# Altium PCB A.PcbDoc (part 3 of 3)
Units mm, origin at the board's own origin, x right, y up, seen from the top; angles counter-clockwise.
Board outline 93 x 60 mm, 2 copper layers (Top Layer, Bottom Layer); 76 components, 75 nets, 446 pads, 247 vias.
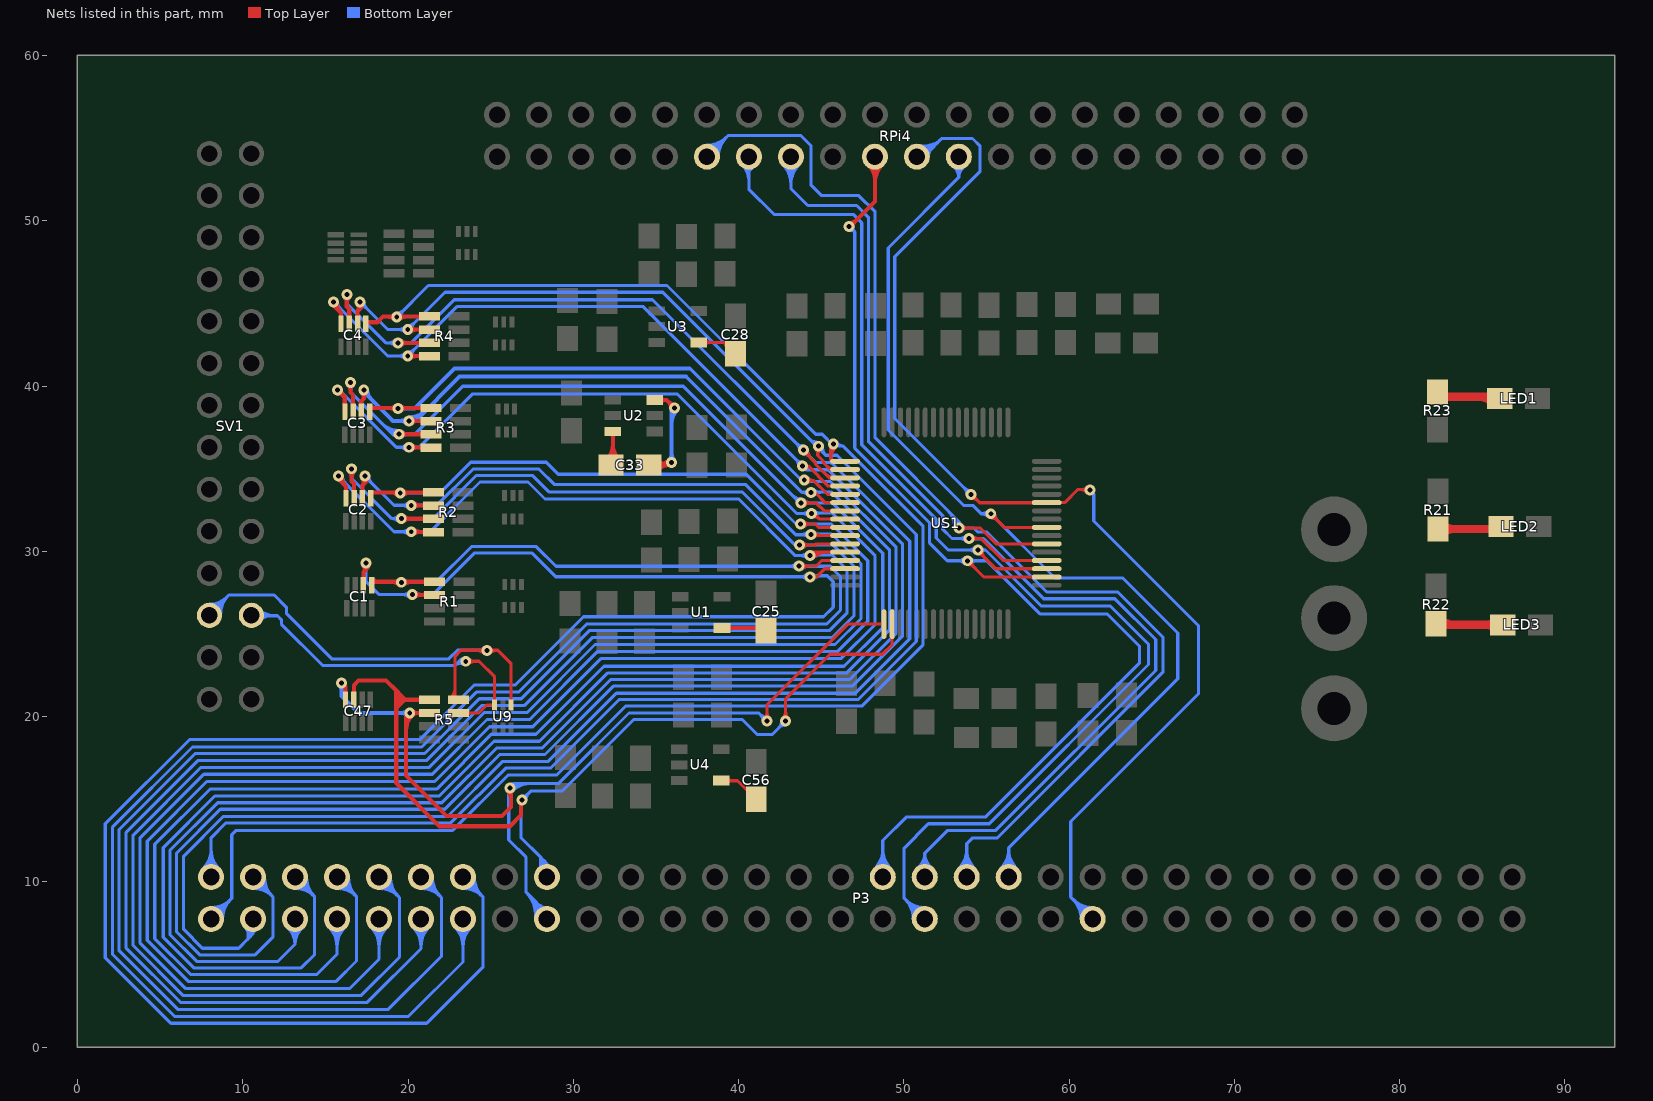
[diagram p3: the nets of this part, all layers, seen from the top]

## Via types
v1: diameter 0.66, hole 0.3, Top Layer to Bottom Layer, tented both sides, 247 vias

## Nets (pads, with @x,y where several pads share a name; then routed paths per layer and width w, separated by ;. In a path a pad name is that pad's centre, name@x,y a point inside that pad or via, vN(x,y) a via of type N, cw(c..) or ccw(c..) an arc to the next point about the centre after c; other vN are vias at no path point) (continued)
IN2N: C1.4 P3.13 R1.8 US1.13 | length 131.4
  Top Layer w0.19: v1(43.661,29.102) 44.687,29.102 45.031,29.446 US1.13@46.443,29.446 ; v1@43.827,28.936 cw(c44.228,28.535) 44.228,29.102 cw(c44.228,29.669) v1@43.827,29.268
  Top Layer w0.25: C1.4@17.832,28.321 ccw(c18.234,28.723) 18.234,28.155 ; C1.4@17.863,28.155 R1.8@21.597,28.155 ; 19.023,28.155 cw(c19.023,27.555) v1@19.447,27.979 ; 19.172,28.155 ccw(c19.172,28.544) v1@19.447,28.269 ; v1@19.737,27.979 cw(c20.162,27.555) 20.162,28.155 ; v1@19.737,28.269 ccw(c20.013,28.544) 20.013,28.155 ; R1.8@21.125,28.064 ccw(c20.905,27.843) 20.905,28.155 ccw(c20.905,28.466) R1.8@21.125,28.246
  Bottom Layer w0.19: v1(19.592,28.124) 21.681,28.124 23.842,30.285 27.763,30.285 28.957,29.092 45.545,29.092 46.171,28.465 46.171,26.44 45.323,25.592 30.801,25.592 26.685,21.476 24.137,21.476 20.823,18.162 6.964,18.162 2.129,13.327 2.129,5.602 5.88,1.852 20.026,1.852 23.325,5.151 P3.13@23.325,7.752 ; v1@19.758,27.958 cw(c20.16,27.557) 20.16,28.124 cw(c20.16,28.691) v1@19.758,28.29 ; P3.13@22.835,7.263 cw(c21.653,6.081) 23.325,6.081 cw(c24.996,6.081) P3.13@23.814,7.263 ; P3.13@22.97,7.397 cw(c22.112,6.54) 23.325,6.54 cw(c24.538,6.54) P3.13@23.68,7.397 ; 43.069,29.092 ccw(c43.069,29.694) v1@43.495,29.268 ; 43.118,29.092 cw(c43.118,28.56) v1@43.495,28.936 ; v1@43.827,28.936 cw(c44.203,28.56) 44.203,29.092 ; v1@43.827,29.268 ccw(c44.253,29.694) 44.253,29.092
IN2P: C1.3 P3.14 R1.7 US1.14 | length 139.7
  Top Layer w0.19: 17.447,28.88 17.454,28.887 ; v1(44.317,28.456) 44.729,28.456 ; v1@44.351,28.543 v1@44.381,28.512 ; v1@44.519,28.337 cw(c44.729,28.212) 44.729,28.456 ; v1@44.519,28.576 ccw(c44.729,28.701) 44.729,28.456 ; US1.14@46.443,28.946 45.219,28.946 44.815,28.543 44.729,28.456
  Top Layer w0.25: C1.3@17.304,27.958 17.304,28.737 ; v1@17.307,29.146 cw(c17.098,28.943) 17.304,28.737 ; v1@17.327,29.129 cw(c17.129,28.88) 17.447,28.88 ; v1@17.447,29.296 17.447,28.88 ; 17.483,28.916 ccw(c17.28,29.12) v1@17.486,29.32 ; v1@17.572,29.122 ccw(c17.743,28.88) 17.447,28.88 ; v1@20.346,27.365 R1.7@21.569,27.365 ; v1@20.403,27.23 cw(c20.729,26.905) 20.729,27.365 ; v1@20.403,27.52 ccw(c20.778,27.895) 20.778,27.365 ; 20.879,27.365 cw(c20.879,27.018) R1.7@21.125,27.264 ; 20.93,27.365 ccw(c20.93,27.641) R1.7@21.125,27.446 ; 17.304,28.737 17.447,28.88
  Bottom Layer w0.19: v1@17.288,29.123 cw(c16.887,28.722) 17.454,28.722 cw(c18.021,28.722) v1@17.62,29.123 ; v1(17.454,29.289) 17.454,28.186 18.264,27.375 v1(20.258,27.375) 21.491,27.375 24.006,29.891 27.506,29.891 28.941,28.456 v1(44.317,28.456) 44.378,28.518 45.37,28.518 45.726,28.162 45.726,26.624 45.139,26.037 30.617,26.037 26.501,21.92 24.021,21.92 20.707,18.606 6.78,18.606 1.685,13.511 1.685,5.41 5.649,1.446 21.128,1.446 24.547,4.864 24.547,9.071 P3.14@23.325,10.292 ; v1@20.092,27.209 ccw(c19.691,26.808) 19.691,27.375 ccw(c19.691,27.943) v1@20.092,27.542 ; v1@20.425,27.209 cw(c20.826,26.808) 20.826,27.375 cw(c20.826,27.943) v1@20.425,27.542 ; P3.14@23.325,9.6 cw(c23.325,7.928) 24.507,9.11 cw(c25.689,10.292) P3.14@24.017,10.292 ; P3.14@23.325,9.79 cw(c23.325,8.577) 24.182,9.435 cw(c25.04,10.292) P3.14@23.827,10.292 ; v1@44.15,28.29 ccw(c43.749,27.889) 43.749,28.456 ccw(c43.749,29.024) v1@44.15,28.623 ; v1@44.483,28.29 cw(c45.033,27.74) 45.033,28.518 ; v1@44.483,28.623 ccw(c44.735,28.875) 44.735,28.518
IN3N: C2.2 P3.11 R2.6 US1.11 | length 135
  Top Layer w0.19: v1(43.697,30.371) 44.614,30.372 44.688,30.446 US1.11@46.443,30.446 ; v1@43.864,30.204 cw(c44.268,29.8) 44.268,30.372 ; v1@43.864,30.537 ccw(c44.262,30.935) 44.262,30.372
  Top Layer w0.25: v1@16.448,34.847 cw(c16.11,34.508) 16.588,34.508 ; 16.588,34.326 16.588,34.241 ; 16.588,34.485 cw(c17.099,34.485) v1@16.738,34.847 ; v1(16.593,34.992) 16.588,34.987 16.588,34.241 ; C2.2@16.738,33.216 16.738,34.091 16.588,34.241 ; v1@19.412,31.973 19.62,31.973 R2.6@21.506,31.973 ; v1@19.739,31.829 cw(c20.086,31.481) 20.086,31.973 ; v1@19.739,32.118 ccw(c20.091,32.471) 20.091,31.973 ; 20.817,31.973 cw(c20.817,31.626) R2.6@21.062,31.871 ; 20.867,31.973 ccw(c20.867,32.248) R2.6@21.062,32.053
  Bottom Layer w0.19: v1@16.427,34.826 cw(c16.026,34.424) 16.593,34.424 cw(c17.16,34.424) v1@16.759,34.826 ; v1(16.593,34.992) 16.593,34.406 19.026,31.973 v1(19.594,31.973) 21.526,31.973 24.144,34.591 27.526,34.591 28.524,33.593 40.208,33.593 43.429,30.372 45.719,30.372 46.986,29.106 46.986,26.102 45.661,24.777 31.139,24.777 27.022,20.661 24.449,20.661 21.135,17.347 7.301,17.347 2.944,12.99 2.944,5.992 6.231,2.705 17.533,2.705 20.785,5.957 P3.11@20.785,7.752 ; v1@19.427,31.807 ccw(c19.026,31.406) 19.026,31.973 ccw(c19.026,32.541) v1@19.427,32.14 ; v1@19.76,31.807 cw(c20.161,31.406) 20.161,31.973 cw(c20.161,32.541) v1@19.76,32.14 ; P3.11@20.295,7.263 cw(c19.113,6.081) 20.785,6.081 cw(c22.456,6.081) P3.11@21.274,7.263 ; P3.11@20.43,7.397 cw(c19.572,6.54) 20.785,6.54 cw(c21.998,6.54) P3.11@21.14,7.397 ; v1@43.864,30.204 cw(c44.268,29.8) 44.268,30.372 ; v1@43.864,30.537 ccw(c44.261,30.934) 44.261,30.372
IN3P: C2.1 P3.12 R2.5 US1.12 | length 140.2
  Top Layer w0.19: v1(44.31,29.741) 44.515,29.946 US1.12@46.443,29.946 ; v1@44.341,29.709 cw(c44.914,29.136) 44.914,29.946 ; v1@44.476,29.575 cw(c45.373,28.677) 45.373,29.946
  Top Layer w0.25: v1@15.781,34.554 v1(15.788,34.547) 15.788,34.368 16.238,33.918 ; v1@15.993,34.54 ccw(c16.831,34.511) 16.238,33.918 ; C2.1@16.238,33.216 16.238,33.918 ; v1@20.284,31.173 R2.5@21.506,31.173 ; v1@20.341,31.038 cw(c20.666,30.712) 20.666,31.173 ; v1@20.341,31.328 ccw(c20.715,31.702) 20.715,31.173 ; 20.817,31.173 cw(c20.817,30.826) R2.5@21.062,31.071 ; 20.867,31.173 ccw(c20.867,31.448) R2.5@21.062,31.253
  Bottom Layer w0.19: v1@15.788,34.312 cw(c15.788,33.744) 16.189,34.146 cw(c16.59,34.547) v1@16.023,34.547 ; v1(15.788,34.547) 19.152,31.183 v1(20.196,31.183) 21.343,31.183 24.354,34.194 27.26,34.194 28.289,33.165 40.008,33.165 43.432,29.741 v1(44.31,29.741) 44.347,29.778 45.657,29.778 46.565,28.87 46.565,26.277 45.487,25.198 30.964,25.198 26.848,21.082 24.317,21.082 21.003,17.768 7.127,17.768 2.523,13.164 2.523,5.83 6.07,2.284 18.811,2.284 22.024,5.497 22.024,9.053 P3.12@20.785,10.292 ; v1@20.029,31.016 ccw(c19.628,30.615) 19.628,31.183 ccw(c19.628,31.75) v1@20.029,31.349 ; v1@20.362,31.016 cw(c20.763,30.615) 20.763,31.183 cw(c20.763,31.75) v1@20.362,31.349 ; P3.12@20.785,9.6 cw(c20.785,7.928) 21.967,9.11 cw(c23.149,10.292) P3.12@21.477,10.292 ; P3.12@20.785,9.79 cw(c20.785,8.577) 21.642,9.435 cw(c22.5,10.292) P3.12@21.287,10.292 ; v1@44.143,29.575 ccw(c43.742,29.173) 43.742,29.741 ccw(c43.742,30.308) v1@44.143,29.907 ; v1@44.476,29.575 cw(c44.966,29.084) 44.966,29.778 ; v1@44.476,29.907 ccw(c44.788,30.219) 44.788,29.778
IN4N: C2.4 P3.9 R2.8 US1.9 | length 125.5
  Top Layer w0.19: v1(43.754,31.641) 43.764,31.651 44.633,31.651 44.838,31.446 US1.9@46.443,31.446 ; v1@43.92,31.475 cw(c44.346,31.048) 44.346,31.651 ; v1@43.92,31.807 ccw(c44.295,32.183) 44.295,31.651
  Top Layer w0.25: C2.4@17.822,33.562 R2.8@21.534,33.562 ; 18.96,33.562 cw(c18.96,32.962) v1@19.385,33.386 ; 19.109,33.562 ccw(c19.109,33.952) v1@19.385,33.676 ; v1@19.674,33.386 cw(c20.099,32.962) 20.099,33.562 ; v1@19.674,33.676 ccw(c19.95,33.952) 19.95,33.562 ; R2.8@21.062,33.471 ccw(c20.842,33.251) 20.842,33.562 ccw(c20.842,33.874) R2.8@21.062,33.653
  Bottom Layer w0.19: P3.9@17.755,7.263 cw(c16.573,6.081) 18.245,6.081 cw(c19.916,6.081) P3.9@18.734,7.263 ; P3.9@17.89,7.397 cw(c17.032,6.54) 18.245,6.54 cw(c19.458,6.54) P3.9@18.6,7.397 ; P3.9@18.245,7.752 18.245,5.323 16.461,3.54 6.563,3.54 3.779,6.324 3.779,12.644 7.647,16.512 21.463,16.512 24.777,19.826 27.368,19.826 31.484,23.943 46.006,23.943 47.82,25.757 47.82,29.438 45.606,31.652 43.475,31.652 40.465,34.663 29.082,34.663 28.361,35.385 23.798,35.385 21.945,33.531 v1(19.529,33.531) ; v1@19.696,33.365 cw(c20.097,32.964) 20.097,33.531 cw(c20.097,34.099) v1@19.696,33.697 ; v1@43.92,31.475 cw(c44.349,31.046) 44.349,31.652 ; v1@43.92,31.807 ccw(c44.293,32.18) 44.293,31.652
IN4P: C2.3 P3.10 R2.7 US1.10 | length 134.6
  Top Layer w0.19: v1(44.37,31.021) 44.445,30.946 US1.10@46.443,30.946 ; v1@44.53,31.072 v1@44.558,31.045 ; v1@44.536,30.855 cw(c44.757,30.635) 44.757,30.946 ; v1@44.536,31.187 ccw(c45.119,31.77) 45.119,30.946
  Top Layer w0.25: C2.3@17.238,33.216 17.238,33.985 ; v1@17.241,34.404 cw(c17.027,34.196) 17.238,33.985 ; v1@17.265,34.383 cw(c17.078,34.135) 17.388,34.135 ; v1@17.381,34.554 v1(17.388,34.547) 17.388,34.135 ; 17.417,34.165 ccw(c17.209,34.373) v1@17.42,34.578 ; v1@17.511,34.383 ccw(c17.698,34.135) 17.388,34.135 ; v1@20.284,32.772 R2.7@21.506,32.772 ; v1@20.341,32.638 cw(c20.666,32.312) 20.666,32.772 ; v1@20.341,32.928 ccw(c20.715,33.302) 20.715,32.772 ; 20.817,32.772 cw(c20.817,32.426) R2.7@21.062,32.671 ; 20.867,32.772 ccw(c20.867,33.048) R2.7@21.062,32.853 ; 17.238,33.985 17.388,34.135
  Bottom Layer w0.19: v1@17.388,34.312 cw(c17.388,33.744) 17.789,34.146 cw(c18.19,34.547) v1@17.623,34.547 ; v1(17.388,34.547) 19.152,32.783 v1(20.196,32.783) 21.748,32.783 23.948,34.983 27.914,34.983 28.847,34.049 40.4,34.049 43.451,30.999 44.348,30.999 v1(44.37,31.021) 44.398,31.049 45.619,31.049 47.407,29.262 47.407,25.928 45.835,24.356 31.313,24.356 27.197,20.24 24.595,20.24 21.281,16.926 7.476,16.926 3.365,12.815 3.365,6.15 6.382,3.134 17.177,3.134 19.489,5.446 19.489,9.048 P3.10@18.245,10.292 ; P3.10@18.245,9.6 cw(c18.245,7.928) 19.427,9.11 cw(c20.609,10.292) P3.10@18.937,10.292 ; P3.10@18.245,9.79 cw(c18.245,8.577) 19.102,9.435 cw(c19.96,10.292) P3.10@18.747,10.292 ; v1@20.029,32.616 ccw(c19.628,32.215) 19.628,32.783 ccw(c19.628,33.35) v1@20.029,32.949 ; v1@20.362,32.616 cw(c20.763,32.215) 20.763,32.783 cw(c20.763,33.35) v1@20.362,32.949 ; 43.749,30.999 ccw(c43.749,31.643) v1@44.204,31.187 ; 43.857,30.999 cw(c43.857,30.508) v1@44.204,30.855 ; v1@44.536,30.855 cw(c45.006,30.386) 45.006,31.049 ; v1@44.536,31.187 ccw(c44.869,31.52) 44.869,31.049
IN5N: C3.2 P3.7 R3.6 US1.7 | length 134.2
  Top Layer w0.19: v1(43.781,32.932) 43.8,32.913 44.71,32.913 45.177,32.446 US1.7@46.443,32.446 ; v1@43.948,32.766 cw(c44.303,32.411) 44.303,32.913 ; v1@43.948,33.098 ccw(c44.395,33.545) 44.395,32.913
  Top Layer w0.25: v1@16.384,40.07 cw(c16.046,39.731) 16.524,39.731 ; 16.524,39.708 cw(c17.036,39.708) v1@16.674,40.07 ; v1(16.529,40.214) 16.524,40.21 16.524,39.614 16.674,39.464 C3.2@16.674,38.438 ; v1@19.273,37.083 v1@19.481,37.083 ; v1@19.481,37.082 R3.6@21.367,37.082 ; v1@19.599,36.938 cw(c19.947,36.59) 19.947,37.082 ; v1@19.599,37.228 ccw(c19.952,37.58) 19.952,37.082 ; 20.677,37.082 cw(c20.677,36.735) R3.6@20.923,36.98 ; 20.728,37.082 ccw(c20.728,37.358) R3.6@20.923,37.163
  Bottom Layer w0.19: P3.7@15.215,7.263 cw(c14.033,6.081) 15.705,6.081 cw(c17.376,6.081) P3.7@16.194,7.263 ; P3.7@15.35,7.397 cw(c14.492,6.54) 15.705,6.54 cw(c16.918,6.54) P3.7@16.06,7.397 ; P3.7@15.705,7.752 15.705,5.619 14.482,4.397 6.849,4.397 4.679,6.567 4.679,12.271 8.02,15.612 21.729,15.612 25.044,18.927 27.74,18.927 31.857,23.043 46.379,23.043 48.72,25.384 48.72,29.887 45.695,32.912 43.728,32.912 36.655,39.984 23.301,39.984 20.4,37.083 v1(19.454,37.083) 19.066,37.083 ; v1@16.363,40.048 cw(c15.962,39.647) 16.529,39.647 cw(c17.096,39.647) v1@16.695,40.048 ; v1(16.529,40.214) 16.529,39.62 19.066,37.083 ; 18.391,37.758 ccw(c19.454,38.822) v1@19.454,37.318 ; 18.715,37.434 ccw(c19.454,38.173) v1@19.454,37.128 ; 19.04,37.11 ccw(c19.454,37.524) v1@19.454,36.938 ; v1@19.246,36.974 ccw(c19.066,36.88) 19.066,37.083 ; v1@19.246,37.192 cw(c19.066,37.286) 19.066,37.083 ; v1@19.621,36.917 cw(c20.022,36.516) 20.022,37.083 cw(c20.022,37.65) v1@19.621,37.249 ; 43.254,33.386 ccw(c43.781,33.913) v1@43.781,33.167 ; 43.433,33.207 cw(c43.158,32.932) v1@43.546,32.932 ; v1@43.948,32.766 cw(c44.299,32.414) 44.299,32.912 ; v1@43.948,33.098 ccw(c44.398,33.549) 44.398,32.912
IN5P: C3.1 P3.8 R3.5 US1.8 | length 135.1
  Top Layer w0.19: v1@44.467,32.058 cw(c44.59,31.635) 44.902,31.946 ; v1@44.574,32.315 44.574,32.274 44.902,31.946 ; US1.8@46.443,31.946 44.902,31.946
  Top Layer w0.25: v1@15.717,39.777 v1(15.724,39.77) 16.174,39.32 C3.1@16.174,38.438 ; v1@15.724,39.565 cw(c15.724,39.07) 16.074,39.42 cw(c16.424,39.77) v1@15.929,39.77 ; v1@20.144,36.282 R3.5@21.367,36.282 ; v1@20.201,36.147 cw(c20.527,35.822) 20.527,36.282 ; v1@20.201,36.437 ccw(c20.576,36.811) 20.576,36.282 ; 20.677,36.282 cw(c20.677,35.935) R3.5@20.923,36.18 ; 20.728,36.282 ccw(c20.728,36.558) R3.5@20.923,36.363
  Bottom Layer w0.19: P3.8@15.705,9.6 cw(c15.705,7.928) 16.887,9.11 ; P3.8@15.705,9.79 cw(c15.705,8.577) 16.562,9.435 cw(c17.42,10.292) P3.8@16.207,10.292 ; P3.8@15.705,10.292 16.887,9.11 ; v1@15.724,39.535 cw(c15.724,38.734) 16.29,39.3 ; v1(15.724,39.77) 15.821,39.77 19.298,36.292 v1(20.056,36.292) 20.687,36.292 23.921,39.526 36.278,39.526 43.521,32.284 v1(44.402,32.284) 44.433,32.315 45.667,32.315 48.26,29.721 48.26,25.574 46.189,23.503 31.667,23.503 27.55,19.386 24.927,19.386 21.613,16.072 7.829,16.072 4.219,12.462 4.219,6.457 6.7,3.976 15.652,3.976 16.887,5.211 16.887,9.11 ; v1@15.959,39.77 ccw(c16.294,39.77) 16.057,39.533 ; P3.8@16.397,10.292 ccw(c18.069,10.292) 16.887,9.11 ; v1@19.89,36.126 ccw(c19.489,35.725) 19.489,36.292 ccw(c19.489,36.859) v1@19.89,36.458 ; v1@20.223,36.126 cw(c20.624,35.725) 20.624,36.292 cw(c20.624,36.859) v1@20.223,36.458 ; v1@44.236,32.117 ccw(c43.835,31.716) 43.835,32.284 ccw(c43.835,32.851) v1@44.236,32.45 ; v1@44.568,32.117 cw(c45.045,31.641) 45.045,32.315 ; v1@44.568,32.45 ccw(c44.894,32.776) 44.894,32.315
IN6N: C3.4 P3.5 R3.8 US1.5 | length 121.1
  Top Layer w0.19: v1@43.981,34.274 44.549,34.274 ; v1@44.141,34.142 cw(c44.459,33.823) 44.459,34.274 ; v1@44.155,34.458 ccw(c44.549,34.786) 44.549,34.274 ; US1.5@46.443,33.446 45.377,33.446 44.549,34.274
  Top Layer w0.25: C3.4@17.702,38.802 ccw(c18.017,39.116) 18.017,38.672 ; C3.4@17.727,38.672 R3.8@21.395,38.672 ; 18.821,38.672 cw(c18.821,38.071) v1@19.245,38.496 ; 18.97,38.672 ccw(c18.97,39.061) v1@19.245,38.786 ; v1@19.535,38.496 cw(c19.96,38.071) 19.96,38.672 ; v1@19.535,38.786 ccw(c19.811,39.061) 19.811,38.672 ; R3.8@20.923,38.58 ccw(c20.703,38.36) 20.703,38.672 ccw(c20.703,38.983) R3.8@20.923,38.763
  Bottom Layer w0.19: P3.5@12.707,7.233 cw(c11.817,6.221) 13.165,6.221 cw(c14.513,6.221) P3.5@13.622,7.233 ; P3.5@12.833,7.375 cw(c12.187,6.641) 13.165,6.641 cw(c14.143,6.641) P3.5@13.497,7.375 ; P3.5@13.165,7.752 13.165,6.221 12.133,5.189 7.216,5.189 5.594,6.811 5.594,11.898 8.482,14.786 22.049,14.786 25.363,18.1 28.12,18.1 32.261,22.24 46.721,22.24 49.529,25.049 49.529,30.248 45.558,34.219 43.89,34.219 37.041,41.069 ; v1@44.006,34.34 ccw(c44.297,34.631) 44.297,34.219 ; v1@44.141,34.142 cw(c44.328,33.955) 44.328,34.219 ; v1@44.141,34.474 ccw(c44.756,35.089) 44.756,34.219
  Bottom Layer w0.25: v1(19.39,38.641) 20.391,38.641 22.819,41.069 37.041,41.069 ; v1@19.535,38.496 cw(c19.885,38.146) 19.885,38.641 cw(c19.885,39.136) v1@19.535,38.786
  other v1: 43.975,34.308
IN6P: C3.3 P3.6 R3.7 US1.6 | length 130.2
  Top Layer w0.19: v1@44.399,33.584 44.61,33.584 45.248,32.946 US1.6@46.443,32.946
  Top Layer w0.25: C3.3@17.174,38.438 17.174,39.102 17.324,39.252 v1(17.324,39.77) v1@17.317,39.777 ; v1@17.179,39.625 cw(c16.829,39.275) 17.324,39.275 cw(c17.819,39.275) v1@17.469,39.625 ; v1@20.144,37.882 R3.7@21.367,37.882 ; v1@20.201,37.747 cw(c20.527,37.422) 20.527,37.882 ; v1@20.201,38.037 ccw(c20.576,38.411) 20.576,37.882 ; 20.677,37.882 cw(c20.677,37.535) R3.7@20.923,37.78 ; 20.728,37.882 ccw(c20.728,38.158) R3.7@20.923,37.963
  Bottom Layer w0.19: P3.6@13.165,9.6 cw(c13.166,7.93) 14.346,9.111 cw(c15.527,10.292) P3.6@13.857,10.292 ; P3.6@13.165,9.79 cw(c13.165,8.578) 14.022,9.435 cw(c14.879,10.292) P3.6@13.667,10.292 ; P3.6@13.165,10.292 14.346,9.111 14.346,5.605 13.536,4.795 7.04,4.795 5.188,6.646 5.188,12.066 8.314,15.192 21.887,15.192 25.2,18.505 27.952,18.505 32.093,22.646 46.553,22.646 49.124,25.217 49.124,30.092 45.633,33.582 44.323,33.582 44.303,33.562 43.833,33.562 ; 36.827,40.569 43.833,33.562 ; 43.864,33.562 ccw(c43.864,34.075) v1@44.226,33.713 ; v1@44.217,33.39 ccw(c43.833,33.05) 43.833,33.562 ; v1@44.558,33.38 cw(c45.046,32.893) 45.046,33.582 ; v1@44.558,33.713 ccw(c44.873,34.027) 44.873,33.582
  Bottom Layer w0.25: v1(17.324,39.77) 17.324,39.647 19.079,37.892 v1(20.056,37.892) 20.447,37.892 ; v1@17.529,39.77 ccw(c18.32,39.77) 17.761,39.21 ; v1@19.911,37.747 ccw(c19.562,37.397) 19.562,37.892 ccw(c19.562,38.387) v1@19.911,38.037 ; v1@20.056,37.847 ccw(c20.056,38.681) 20.646,38.091 ; v1@20.056,38.097 ccw(c20.056,39.534) 21.073,38.518 ; v1@20.225,37.776 cw(c20.447,37.623) 20.447,37.892 ; v1@20.225,38.008 ccw(c20.447,38.161) 20.447,37.892 ; 36.827,40.569 23.124,40.569 20.447,37.892
  other v1: 44.392,33.546
IN7N: C4.2 P3.3 R4.6 US1.3 | length 131.2
  Top Layer w0.19: v1@43.92,35.905 cw(c43.92,35.46) 44.235,35.775 ; v1@43.999,36.171 43.999,36.01 44.65,35.36 44.65,35.281 45.484,34.446 US1.3@46.443,34.446 ; v1@44.155,36.14 ccw(c44.845,36.14) 44.357,35.652 ; 45.242,34.688 ccw(c45.693,35.138) US1.3@45.693,34.501
  Top Layer w0.25: v1@16.155,45.393 cw(c15.817,45.054) 16.295,45.054 ; 16.295,45.031 cw(c16.807,45.031) v1@16.445,45.393 ; 16.295,45.033 16.295,44.817 ; v1(16.3,45.538) 16.295,45.533 16.295,44.817 ; C4.2@16.445,43.762 16.445,44.667 16.295,44.817 ; v1@19.201,42.61 v1@19.409,42.61 ; v1@19.41,42.609 R4.6@21.295,42.609 ; v1@19.528,42.465 cw(c19.875,42.118) 19.875,42.609 ; v1@19.528,42.755 ccw(c19.88,43.108) 19.88,42.609 ; R4.6@20.823,42.518 ccw(c20.603,42.298) 20.603,42.609 ccw(c20.603,42.921) R4.6@20.823,42.701
  Bottom Layer w0.19: P3.3@10.135,7.263 cw(c9.699,6.827) 10.316,6.827 ; P3.3@10.204,7.203 cw(c9.803,6.68) 10.462,6.68 cw(c10.869,6.68) P3.3@10.779,7.077 ; 10.316,6.507 cw(c10.898,6.507) P3.3@10.773,7.076 ; 10.316,6.744 cw(c10.846,6.744) P3.3@10.733,7.262 ; 10.316,6.98 cw(c10.794,6.98) P3.3@10.692,7.447 ; P3.3@10.449,7.083 cw(c10.39,6.855) 10.625,6.855 ; 10.462,6.918 cw(c10.815,6.918) P3.3@10.737,7.263 ; P3.3@10.8,7.083 ccw(c10.86,6.855) 10.625,6.855 ; v1@16.135,45.371 cw(c15.742,44.974) 16.3,44.974 ; 16.3,44.952 16.3,44.974 ; v1(16.3,45.538) 16.3,44.974 ; v1@16.466,45.371 ccw(c16.859,44.974) 16.3,44.974 ; v1@19.216,42.444 ccw(c18.815,42.043) 18.815,42.61 ccw(c18.815,43.178) v1@19.216,42.777 ; v1@19.549,42.444 cw(c19.95,42.043) 19.95,42.61 cw(c19.95,43.178) v1@19.549,42.777 ; 43.438,36.575 ccw(c43.92,37.057) v1@43.92,36.375 ; 43.552,36.46 cw(c43.232,36.14) v1@43.685,36.14 ; v1@43.92,35.905 cw(c43.92,35.452) 44.24,35.772 ; v1@44.155,36.14 ccw(c44.837,36.14) 44.355,35.658 ; 45.571,35.358 cw(c45.571,35.255) 45.644,35.328 ; 10.316,6.546 10.462,6.692 ; 10.316,6.546 9.753,5.984 7.56,5.984 6.422,7.122 6.422,11.555 8.825,13.958 22.388,13.958 25.701,17.271 28.463,17.271 32.604,21.412 47.064,21.412 50.358,24.705 50.358,30.614 45.595,35.377 44.635,35.377 34.789,45.223 22.799,45.223 20.186,42.61 v1(19.383,42.61) 18.664,42.61 16.3,44.974 ; 10.316,6.546 10.316,7.443 cw(c10.625,7.443) P3.3@10.625,7.752 ; 10.462,6.692 10.462,7.59 cw(c10.625,7.59) P3.3@10.625,7.752 ; 10.462,6.692 10.625,6.855 ; 10.625,6.855 P3.3@10.625,7.752
  other v1: 43.92,36.14
IN7P: C4.1 P3.4 R4.5 US1.4 | length 129.9
  Top Layer w0.19: v1(43.872,35.166) 44.21,35.166 ; v1@44.093,35.084 cw(c44.21,35.041) 44.21,35.166 ; v1@44.093,35.247 ccw(c44.21,35.291) 44.21,35.166 ; US1.4@46.443,33.946 45.43,33.946 44.21,35.166
  Top Layer w0.25: v1@15.488,45.1 v1(15.495,45.093) 15.495,44.882 15.945,44.432 ; v1@15.7,45.08 ccw(c16.542,45.029) 15.945,44.432 ; C4.1@15.945,43.762 15.945,44.432 ; v1@20.073,41.809 R4.5@21.295,41.809 ; v1@20.13,41.675 cw(c20.455,41.349) 20.455,41.809 ; v1@20.13,41.965 ccw(c20.504,42.339) 20.504,41.809 ; R4.5@20.823,41.718 ccw(c20.603,41.498) 20.603,41.809 ccw(c20.603,42.121) R4.5@20.823,41.901
  Bottom Layer w0.19: P3.4@10.625,9.6 cw(c10.625,7.928) 11.807,9.11 cw(c12.989,10.292) P3.4@11.317,10.292 ; P3.4@10.625,9.79 cw(c10.625,8.577) 11.482,9.435 cw(c12.34,10.292) P3.4@11.127,10.292 ; P3.4@10.625,10.292 11.824,9.094 11.824,6.656 10.75,5.582 7.394,5.582 5.992,6.984 5.992,11.733 8.647,14.388 22.233,14.388 25.547,17.702 28.285,17.702 32.426,21.843 46.886,21.843 49.927,24.884 49.927,30.435 45.429,34.934 44.095,34.934 34.21,44.819 22.984,44.819 v1(19.985,41.82) 18.769,41.82 v1(15.495,45.093) ; v1@15.495,44.858 cw(c15.495,44.29) 15.897,44.692 cw(c16.298,45.093) v1@15.73,45.093 ; v1@19.819,41.653 ccw(c19.417,41.252) 19.417,41.82 ccw(c19.417,42.387) v1@19.819,41.986 ; v1@19.985,42.055 ccw(c19.985,42.622) 20.386,42.221 ccw(c20.787,41.82) v1@20.22,41.82 ; 43.455,35.573 ccw(c43.872,35.991) v1@43.872,35.401 ; 43.478,35.551 cw(c43.092,35.166) v1@43.637,35.166
IN8N: C4.4 P3.1 R4.8 US1.1 | length 114.3
  Top Layer w0.19: 45.561,35.528 cw(c46.704,35.528) v1@45.896,36.337 ; 45.561,35.898 ccw(c46.144,35.898) US1.1@45.732,35.485 ; 45.561,35.986 cw(c46.246,35.986) v1@45.762,36.471 ; US1.1@45.685,35.501 cw(c45.666,35.647) 45.561,35.543 ; v1(45.73,36.503) 45.561,36.334 45.561,35.543 ; US1.1@46.443,35.446 45.657,35.446 45.561,35.543
  Top Layer w0.25: C4.4@17.474,43.733 cw(c17.771,43.436) 17.771,43.856 ; C4.4@17.503,43.856 18.143,43.856 18.486,44.199 R4.8@21.323,44.199 ; 18.749,44.199 cw(c18.749,43.599) v1@19.174,44.023 ; 18.898,44.199 ccw(c18.898,44.589) v1@19.174,44.313 ; v1@19.463,44.023 cw(c19.888,43.599) 19.888,44.199 ; v1@19.463,44.313 ccw(c19.739,44.589) 19.739,44.199 ; 20.578,44.199 ccw(c20.578,44.546) R4.8@20.823,44.301 ; 20.628,44.199 cw(c20.628,43.923) R4.8@20.823,44.118
  Bottom Layer w0.19: P3.1@8.085,7.752 9.334,9.002 9.334,12.845 9.603,13.114 22.701,13.114 26.054,16.468 28.998,16.468 33.161,20.631 47.461,20.631 51.152,24.322 51.152,31.549 46.335,36.366 ; P3.1@8.085,8.255 ccw(c8.085,9.468) 8.942,8.61 ccw(c9.8,7.752) P3.1@8.587,7.752 ; P3.1@8.085,8.445 ccw(c8.085,10.116) 9.267,8.934 ccw(c10.449,7.752) P3.1@8.777,7.752 ; v1(19.319,44.168) 21.234,46.083 35.666,46.083 44.668,37.081 45.061,37.081 45.776,36.366 46.335,36.366 ; v1@19.319,44.403 ccw(c19.319,44.971) 19.72,44.569 ccw(c20.121,44.168) v1@19.554,44.168 ; v1@45.94,36.609 ccw(c46.335,36.81) 46.335,36.366
IN8P: C4.3 P3.2 R4.7 US1.2 | length 117.2
  Top Layer w0.19: v1@44.667,36.192 cw(c44.383,35.908) 44.784,35.908 ; 44.784,35.797 cw(c45.246,35.797) v1@44.972,36.169 ; v1(44.833,36.358) 44.722,36.212 44.784,36.274 44.784,35.799 45.138,35.445 45.138,35.35 45.542,34.946 US1.2@46.443,34.946 ; 45.341,35.147 ccw(c45.693,35.498) US1.2@45.693,35.001
  Top Layer w0.25: C4.3@16.945,43.762 16.937,43.77 16.937,44.511 ; v1@16.945,44.953 cw(c16.711,44.737) 16.937,44.511 ; v1@17,44.911 cw(c16.918,44.754) 17.095,44.754 ; v1@17.088,45.1 v1(17.095,45.093) 17.095,44.67 ; 17.12,44.695 ccw(c16.902,44.913) v1@17.128,45.123 ; v1@17.191,44.911 ccw(c17.273,44.754) 17.095,44.754 ; v1@20.073,43.409 R4.7@21.295,43.409 ; v1@20.13,43.275 cw(c20.455,42.949) 20.455,43.409 ; v1@20.13,43.565 ccw(c20.504,43.939) 20.504,43.409 ; R4.7@20.823,43.318 ccw(c20.603,43.098) 20.603,43.409 ccw(c20.603,43.721) R4.7@20.823,43.501 ; 16.937,44.511 17.095,44.67 ; 17.095,44.67 cw(c17.429,44.67) 17.222,44.932 ccw(c17.429,44.67) 17.095,44.67 ; 17.095,44.67 ccw(c16.762,44.67) 16.968,44.932 cw(c16.762,44.67) 17.095,44.67 ; 17.095,44.67 17.095,44.754
  Bottom Layer w0.19: P3.2@7.595,10.782 ccw(c6.413,11.964) 8.085,11.964 ccw(c9.756,11.964) P3.2@8.574,10.782 ; P3.2@7.73,10.648 ccw(c6.872,11.505) 8.085,11.505 ccw(c9.298,11.505) P3.2@8.44,10.648 ; P3.2@8.085,10.292 8.085,12.666 8.987,13.568 22.59,13.568 25.904,16.881 28.625,16.881 32.766,21.022 47.226,21.022 50.748,24.544 50.748,31.019 45.953,35.813 45.272,35.813 ; v1@17.095,44.858 cw(c17.095,44.29) 17.497,44.692 cw(c17.898,45.093) v1@17.33,45.093 ; v1(17.095,45.093) 18.769,43.42 v1(19.985,43.42) 22.24,45.675 35.411,45.675 45.272,35.813 ; v1@19.819,43.253 ccw(c19.417,42.852) 19.417,43.42 ccw(c19.417,43.987) v1@19.819,43.586 ; v1@19.985,43.655 ccw(c19.985,44.222) 20.386,43.821 ccw(c20.787,43.42) v1@20.22,43.42 ; 44.252,36.833 ccw(c44.833,37.414) v1@44.833,36.593 ; 44.506,36.579 cw(c44.285,36.358) v1@44.598,36.358 ; v1@44.833,36.123 cw(c44.833,35.809) 45.055,36.031 ; v1@45.068,36.346 ccw(c45.768,36.31) 45.272,35.813
MISO: P3.43 RPi4.21 US1.43 | length 82.2
  Top Layer w0.19: v1@54.051,33.2 cw(c54.051,32.539) 54.518,33.006 ; v1@54.094,33.43 54.586,32.938 58.635,32.938 US1.43@58.643,32.946 59.725,32.946 60.517,33.738 61.226,33.738 v1(61.257,33.707) ; v1@54.286,33.435 ccw(c54.759,33.435) 54.424,33.1 ; 57.74,32.938 ccw(c57.74,33.099) US1.43@57.854,32.985 ; 60.615,33.738 cw(c60.615,33.065) v1@61.091,33.541 ; 60.764,33.738 ccw(c60.764,34.2) v1@61.091,33.873
  Bottom Layer w0.19: RPi4.21@50.786,53.876 51.209,53.876 52.31,54.976 ; RPi4.21@50.81,53.996 ccw(c50.971,54.807) 51.555,54.222 ; RPi4.21@50.847,54.182 ccw(c51.054,55.226) 51.807,54.474 ; RPi4.21@50.884,54.369 ccw(c51.137,55.646) 52.058,54.725 ; RPi4.21@50.921,54.555 ccw(c51.221,56.065) 52.31,54.976 ; RPi4.21@51.478,53.876 cw(c52.128,53.876) 51.669,54.335 ; v1@53.816,33.435 ccw(c53.248,33.435) 53.65,33.836 ccw(c54.051,34.237) v1@54.051,33.67 ; v1(54.051,33.435) 49.451,38.034 49.451,47.823 54.617,52.989 54.617,54.511 54.152,54.976 52.31,54.976 ; P3.43@60.732,7.752 ccw(c59.061,7.752) 60.243,8.934 ccw(c61.425,10.116) P3.43@61.425,8.445 ; P3.43@60.922,7.752 ccw(c59.71,7.752) 60.567,8.61 ccw(c61.425,9.468) P3.43@61.425,8.255 ; v1@61.247,33.698 61.488,33.457 61.488,31.833 67.825,25.496 67.825,21.378 60.101,13.653 60.101,9.076 P3.43@61.425,7.752
MOSI: P3.34 RPi4.19 US1.34 | length 83.6
  Top Layer w0.19: v1@53.846,29.19 cw(c53.846,28.582) 54.276,29.012 ; v1@53.863,29.425 54.842,28.446 US1.34@58.643,28.446 ; v1@54.081,29.425 ccw(c54.609,29.425) 54.236,29.052
  Top Layer w0.25: v1@46.693,49.862 ccw(c46.693,50.485) 47.133,50.044 ; v1@46.714,49.625 48.246,51.157 48.246,52.266 ; v1@46.898,49.657 cw(c47.264,49.657) 47.005,49.916 ; RPi4.19@47.851,53.344 cw(c47.266,52.558) 48.246,52.558 ; RPi4.19@47.913,53.362 cw(c47.108,52.558) 48.246,52.558 ; RPi4.19@48,53.545 cw(c47.636,53.055) 48.246,53.055 cw(c48.855,53.055) RPi4.19@48.492,53.545 ; RPi4.19@48.246,53.876 48.246,52.558 ; RPi4.19@48.641,53.344 ccw(c49.225,52.558) 48.246,52.558 ; RPi4.19@48.742,53.464 ccw(c49.94,52.266) 48.246,52.266 ; 48.246,52.266 48.246,52.558
  Bottom Layer w0.19: v1(46.693,49.657) 47.03,49.319 ; v1@46.723,49.424 cw(c46.771,49.06) 47.03,49.319 ; v1@46.926,49.626 ccw(c47.289,49.579) 47.03,49.319 ; P3.34@48.235,10.782 ccw(c47.053,11.964) 48.725,11.964 ccw(c50.396,11.964) P3.34@49.214,10.782 ; P3.34@48.37,10.648 ccw(c47.512,11.505) 48.725,11.505 ccw(c49.938,11.505) P3.34@49.08,10.648 ; P3.34@48.725,10.292 48.725,12.502 50.136,13.914 54.926,13.914 64.267,23.255 64.267,24.241 62.295,26.213 58.233,26.213 55.021,29.425 v1(53.846,29.425) 52.632,29.425 51.562,30.495 51.562,31.708 47.03,36.24 47.03,47.781 47.03,49.319 ; v1@53.68,29.259 ccw(c53.279,28.858) 53.279,29.425 ccw(c53.279,29.992) v1@53.68,29.591 ; v1@54.013,29.259 cw(c54.414,28.858) 54.414,29.425 cw(c54.414,29.992) v1@54.013,29.591
N_PWDN: P3.35 RPi4.13 US1.35 | length 86.3
  Top Layer w0.19: v1@54.475,29.843 cw(c54.475,29.397) 54.79,29.712 ; v1(54.475,30.078) 54.475,30.027 55.556,28.946 US1.35@58.643,28.946 ; v1@54.71,30.078 ccw(c55.399,30.078) 54.912,29.59
  Bottom Layer w0.19: RPi4.13@40.133,53.456 40.626,52.963 ; RPi4.13@40.263,53.306 cw(c39.388,52.431) 40.626,52.431 ; RPi4.13@40.451,53.206 cw(c40.392,52.979) 40.626,52.979 ; RPi4.13@40.626,53.876 40.626,52.979 ; RPi4.13@40.801,53.206 ccw(c40.86,52.979) 40.626,52.979 ; RPi4.13@41.22,53.573 40.626,52.979 ; P3.35@50.572,7.752 ccw(c48.901,7.752) 50.083,8.934 ccw(c51.265,10.116) P3.35@51.265,8.445 ; P3.35@50.762,7.752 ccw(c49.55,7.752) 50.407,8.61 ccw(c51.265,9.468) P3.35@51.265,8.255 ; P3.35@51.265,7.752 50.016,9.001 50.016,12.043 51.485,13.511 55.168,13.511 64.806,23.15 64.806,24.378 62.501,26.683 58.332,26.683 54.937,30.078 ; v1@54.309,29.912 ccw(c53.907,29.51) 53.907,30.078 ccw(c53.907,30.645) v1@54.309,30.244 ; v1@54.665,29.939 cw(c54.937,29.741) 54.937,30.078 ; v1@54.665,30.216 ccw(c54.937,30.415) 54.937,30.078 ; 40.626,52.431 40.626,51.904 42.146,50.384 46.945,50.384 47.456,49.873 47.456,36.44 51.962,31.935 51.962,30.802 52.685,30.078 v1(54.475,30.078) 54.937,30.078 ; 40.626,52.431 40.626,52.963 ; 40.626,52.963 40.626,52.979
N_RESET: P3.36 RPi4.15 US1.36 | length 81.7
  Top Layer w0.19: v1@53.926,30.714 53.978,30.766 54.688,30.766 56.008,29.446 US1.36@58.643,29.446 ; v1@54.096,30.606 cw(c54.482,30.22) 54.482,30.766 ; v1@54.096,30.939 ccw(c54.512,31.355) 54.512,30.766
  Bottom Layer w0.19: RPi4.15@42.676,53.386 cw(c41.494,52.204) 43.166,52.204 cw(c44.837,52.204) RPi4.15@43.655,53.386 ; RPi4.15@42.811,53.52 cw(c41.953,52.663) 43.166,52.663 cw(c44.379,52.663) RPi4.15@43.521,53.52 ; RPi4.15@43.166,53.876 43.166,51.952 44.193,50.924 47.141,50.924 47.853,50.213 47.853,36.65 52.355,32.148 52.355,31.328 52.911,30.772 v1(53.93,30.772) 53.94,30.762 54.825,30.762 58.455,27.132 62.77,27.132 65.24,24.661 65.24,22.791 55.566,13.116 52.647,13.116 51.265,11.734 ; P3.36@50.832,10.833 ccw(c50.11,11.734) 51.265,11.734 ; P3.36@50.951,10.685 ccw(c50.427,11.339) 51.265,11.339 ccw(c52.103,11.339) P3.36@51.579,10.685 ; P3.36@51.265,10.292 51.265,11.734 ; P3.36@51.698,10.833 cw(c52.42,11.734) 51.265,11.734 ; v1@53.764,30.606 ccw(c53.362,30.205) 53.362,30.772 ccw(c53.362,31.34) v1@53.764,30.939 ; v1@54.096,30.606 cw(c54.472,30.23) 54.472,30.762 ; v1@54.096,30.939 ccw(c54.522,31.365) 54.522,30.762
NetC25_1: C25.1 U1.4 | length 3.4
  Top Layer w0.25: U1.4@38.998,25.352 41.509,25.352 C25.1@41.671,25.19 ; U1.4@39.322,25.228 cw(c39.621,24.929) 39.621,25.352 cw(c39.621,25.774) U1.4@39.322,25.475
NetC28_1: C28.1 U3.4 | length 4.3
  Top Layer w0.19: U3.4@37.588,42.639 39.113,42.639 ; U3.4@37.933,42.494 cw(c38.283,42.144) 38.283,42.639 cw(c38.283,43.134) U3.4@37.933,42.784 ; C28.1@39.269,42.161 ccw(c38.722,42.247) 39.114,42.639 ; C28.1@39.567,42.563 cw(c39.394,42.919) 39.114,42.639 ; C28.1@39.802,41.95 39.113,42.639
NetC33_1: C33.1 U2.6 | length 12.8
  Top Layer w0.25: C33.1@34.562,35.218 v1@35.789,35.218 ; U2.6@34.942,39.159 35.645,39.159 v1(36.126,38.679) ; C33.1@35.064,35.218 ccw(c35.064,36.27) v1@35.808,35.526 ; C33.1@35.078,34.889 cw(c35.789,34.286) v1@35.789,35.218 ; C33.1@35.078,35.548 ccw(c35.789,36.15) v1@35.789,35.218 ; C33.1@35.235,35.07 ccw(c35.005,35.928) v1@35.775,35.484 ; U2.6@35.265,39.036 cw(c35.564,38.737) 35.564,39.159 cw(c35.564,39.582) U2.6@35.265,39.283 ; v1@35.921,38.679 ccw(c35.426,38.679) 35.776,39.029 ccw(c36.126,39.378) v1@36.126,38.884 ; v1(35.953,35.381) v1@35.789,35.218
  Bottom Layer w0.25: v1@35.808,35.526 ccw(c35.458,35.876) 35.953,35.876 ccw(c36.448,35.876) v1@36.098,35.526 ; v1(35.953,35.381) 35.953,38.506 v1(36.126,38.679) ; 35.953,37.766 cw(c37.038,37.766) v1@36.271,38.534 ; 35.953,38.37 cw(c36.435,38.37) v1@36.094,38.71
NetC33_2: C33.2 U2.3 | length 4.6
  Top Layer w0.25: C33.2@32.042,35.579 ccw(c31.175,36.446) 32.402,36.446 ; C33.2@32.276,35.218 32.402,35.344 U2.3@32.402,37.259 ; U2.3@32.296,37.153 cw(c32.04,36.897) 32.402,36.897 cw(c32.764,36.897) U2.3@32.508,37.153 ; 32.402,36.453 ccw(c33.638,36.453) C33.2@32.764,35.579
NetC56_1: C56.1 U4.4 | length 3.3
  Top Layer w0.19: U4.4@38.949,16.121 39.936,16.121 40.855,15.202 C56.1@41.072,15.202 ; U4.4@39.293,15.976 cw(c39.643,15.626) 39.643,16.121 cw(c39.643,16.616) U4.4@39.293,16.266
NetLED1_1: LED1.1 R23.1 | length 4.6
  Top Layer w0.5: R23.1@82.328,39.347 84.435,39.347 LED1.1@85.425,39.347 ; 84.743,39.347 cw(c84.743,38.052) LED1.1@85.659,38.968 ; 85.261,39.347 ccw(c85.261,39.911) LED1.1@85.659,39.512
NetLED2_1: LED2.1 R21.1 | length 4.8
  Top Layer w0.5: R21.1@82.31,31.351 84.74,31.351 LED2.1@85.662,31.351 ; R21.1@82.583,31.079 cw(c83.24,30.422) 83.24,31.351 cw(c83.24,32.281) R21.1@82.583,31.624
NetLED3_1: LED3.1 R22.1 | length 7
  Top Layer w0.5: R22.1@82.207,25.613 82.266,25.553 LED3.1@86.253,25.553 ; R22.1@82.479,25.34 cw(c82.993,24.827) 82.993,25.553 ; R22.1@82.479,25.885 ccw(c83.28,26.686) 83.28,25.553 ; LED3.1@85.838,25.281 ccw(c85.181,24.624) 85.181,25.553 ccw(c85.181,26.483) LED3.1@85.838,25.825
SCLK: P3.40 RPi4.23 US1.40 | length 73.6
  Top Layer w0.19: v1@55.259,32.035 cw(c55.259,31.468) 55.661,31.869 cw(c56.062,32.27) v1@55.494,32.27 ; v1(55.259,32.27) 56.083,31.446 US1.40@58.643,31.446
  Bottom Layer w0.19: RPi4.23@52.958,53.289 cw(c52.541,52.624) 53.326,52.624 ; RPi4.23@53.059,53.45 cw(c52.757,52.968) 53.326,52.968 cw(c53.895,52.968) RPi4.23@53.593,53.45 ; RPi4.23@53.326,53.876 53.326,52.624 ; RPi4.23@53.694,53.289 ccw(c54.11,52.624) 53.326,52.624 ; v1@55.093,32.104 ccw(c54.692,31.703) 54.692,32.27 ccw(c54.692,32.838) v1@55.093,32.436 ; v1@55.259,32.035 cw(c55.259,31.468) 55.661,31.869 cw(c56.062,32.27) v1@55.494,32.27 ; P3.40@55.855,10.782 ccw(c54.673,11.964) 56.345,11.964 ccw(c58.016,11.964) P3.40@56.834,10.782 ; P3.40@55.99,10.648 ccw(c55.132,11.505) 56.345,11.505 ccw(c57.558,11.505) P3.40@56.7,10.648 ; P3.40@56.345,10.292 56.345,12.054 66.572,22.282 66.572,25.058 63.249,28.382 59.148,28.382 v1(55.259,32.27) 54.676,32.27 54.165,32.781 53.612,32.781 49.054,37.339 49.054,48.353 53.326,52.624
SRB1: C47.1 P3.17 R5.7 US1.17 | length 73.1
  Top Layer w0.19: v1@41.554,19.888 ccw(c41.153,20.289) 41.721,20.289 ccw(c42.288,20.289) v1@41.887,19.888 ; v1(41.721,19.722) 41.721,20.704 46.612,25.596 US1.17@48.793,25.596
  Top Layer w0.25: v1(15.986,22.042) 16.229,21.799 ; v1@16.044,21.846 cw(c16.097,21.667) 16.229,21.799 ; v1@16.182,21.983 ccw(c16.36,21.93) 16.229,21.799 ; C47.1@16.229,21.023 16.229,21.799 ; 19.882,19.18 cw(c21.141,19.18) 20.251,20.07 cw(c20.601,19.72) 20.601,20.215 cw(c20.601,20.71) v1@20.251,20.36 ; 19.882,19.783 cw(c20.537,19.783) v1@20.074,20.247 ; R5.7@20.818,20.123 ccw(c20.598,19.903) 20.598,20.215 ccw(c20.598,20.526) R5.7@20.818,20.306 ; R5.7@21.29,20.215 v1(20.106,20.215) 19.882,19.991 19.882,16.44 22.328,13.994 25.695,13.994 26.222,14.521 v1@26.222,15.66 ; v1@26.019,15.53 cw(c25.53,15.04) 26.222,15.04 ; 26.222,15.319 cw(c26.52,15.319) v1@26.309,15.53
  Bottom Layer w0.19: v1@25.998,15.508 cw(c25.771,15.282) 26.092,15.282 ; v1@26.062,15.777 cw(c26.454,15.384) 26.454,15.94 ; 26.092,14.933 cw(c26.906,14.933) 26.33,15.508 cw(c27.372,14.467) 27.372,15.94 ; v1@26.196,15.643 cw(c26.913,14.926) 26.913,15.94 ; 27.434,9.079 cw(c26.284,7.929) P3.17@27.904,7.794 ; P3.17@27.715,7.81 ccw(c25.749,7.974) 27.144,9.368 ; 27.723,8.789 cw(c26.819,7.885) P3.17@28.093,7.778 ; 27.829,8.683 ccw(c28.405,9.259) P3.17@28.405,8.445 ; 28.013,8.499 cw(c27.354,7.84) P3.17@28.283,7.763 ; P3.17@28.405,7.752 28.405,8.107 27.144,9.369 ; v1@41.486,19.722 ccw(c40.918,19.722) 41.319,20.123 ccw(c41.721,20.524) v1@41.721,19.957 ; v1(41.721,19.722) 41.228,20.215 33.373,20.215 29.098,15.94 26.465,15.94 26.092,15.566 26.092,12.532 27.144,11.48 27.144,9.369
  Bottom Layer w0.25: v1@15.841,21.897 cw(c15.491,21.547) 15.986,21.547 cw(c16.48,21.547) v1@16.13,21.897 ; v1(15.986,22.042) 15.986,21.245 17.016,20.215 v1(20.106,20.215) ; v1@19.961,20.07 ccw(c19.611,19.72) 19.611,20.215 ccw(c19.611,20.71) v1@19.961,20.36
  other v1: 26.164,15.674
SRB1_HD: R5.2 SV1.3 U9.6 | length 27.7
  Top Layer w0.19: R5.2@23.068,20.215 24.29,20.215 24.775,20.7 U9.6@25.239,20.7 25.239,22.404 24.298,23.345 v1(23.494,23.345) ; R5.2@23.562,20.102 cw(c23.833,19.831) 23.833,20.215 cw(c23.833,20.599) R5.2@23.562,20.327 ; v1@23.661,23.179 cw(c24.062,22.778) 24.062,23.345 cw(c24.062,23.912) v1@23.661,23.511
  Bottom Layer w0.19: SV1.3@10.413,25.482 cw(c11.899,23.996) 11.899,26.098 ; SV1.3@10.443,26.098 11.899,26.098 ; SV1.3@10.556,26.74 ccw(c12.107,28.291) 12.107,26.098 ; 22.996,23.256 cw(c23.265,22.987) v1@23.47,23.307 ; 23.163,23.423 cw(c23.395,23.191) v1@23.573,23.467 ; v1@23.281,23.246 ccw(c23.101,23.163) 23.101,23.361 ; v1@23.295,23.469 cw(c23.101,23.589) 23.101,23.361 ; v1@23.367,23.147 ccw(c23.134,22.784) 22.829,23.089 ; v1@23.537,23.361 23.101,23.361 ; 11.899,26.098 12.107,26.098 ; 12.107,26.098 12.337,25.867 12.337,25.591 14.839,23.089 22.829,23.089 ; 22.829,23.089 23.101,23.361
SRB2: C47.2 P3.18 R5.8 US1.18 | length 70
  Top Layer w0.19: v1@42.678,19.9 ccw(c42.277,20.301) 42.844,20.301 ccw(c43.411,20.301) v1@43.01,19.9 ; v1(42.844,19.733) 42.844,21.083 45.535,23.774 48.702,23.774 49.293,24.364 US1.18@49.293,25.596
  Top Layer w0.25: C47.2@16.729,21.023 16.729,21.895 17.015,22.181 18.673,22.181 19.288,21.566 ; R5.8@20.818,20.923 ccw(c20.598,20.703) 20.598,21.015 ccw(c20.598,21.326) R5.8@20.818,21.106 ; R5.8@21.29,21.015 19.839,21.015 ; v1@26.829,14.98 26.829,14.032 26.158,13.36 21.912,13.36 19.288,15.984 19.288,20.516 ; 19.288,20.516 19.288,21.566 ; 19.288,20.516 19.483,20.711 ; 19.288,21.566 19.544,21.31 ; 19.483,20.711 19.483,21.25 19.544,21.31 ; 19.483,20.711 19.629,20.856 ; 19.544,21.31 19.665,21.19 ; 19.629,20.856 19.629,21.154 19.665,21.19 ; 19.629,20.856 19.787,21.015 19.839,21.015 ; 19.665,21.19 19.839,21.015
  Bottom Layer w0.19: v1@26.895,15.178 ccw(c26.895,15.708) 27.271,15.333 ; v1@27.13,14.943 cw(c27.735,14.943) 27.307,15.37 ; P3.18@27.989,10.846 ccw(c27.648,11.3) 28.216,11.3 ; 28.034,11.057 ccw(c28.491,11.057) P3.18@28.44,10.603 ; 28.034,11.069 cw(c27.629,11.069) 27.915,10.782 ccw(c27.385,11.313) 28.135,11.313 ; 28.034,11.269 ccw(c28.514,11.269) P3.18@28.461,10.792 ; 28.135,11.166 ccw(c28.513,11.166) P3.18@28.466,10.791 ; 28.216,11.083 ccw(c28.511,11.083) P3.18@28.472,10.79 ; P3.18@28.29,10.975 ccw(c28.267,11.111) 28.405,11.111 ; P3.18@28.482,10.981 cw(c28.538,11.482) 28.034,11.482 ; P3.18@28.49,10.98 cw(c28.539,11.381) 28.135,11.381 ; P3.18@28.497,10.979 cw(c28.54,11.3) 28.216,11.3 ; P3.18@28.52,10.975 cw(c28.542,11.111) 28.405,11.111 ; v1@42.609,19.733 cw(c42.042,19.733) 42.443,19.332 cw(c42.844,18.931) v1@42.844,19.498 ; v1(42.844,19.733) 42.02,18.909 41.146,18.909 40.23,19.825 33.655,19.825 29.318,15.488 27.425,15.488 26.829,14.892 26.829,12.687 28.034,11.482 ; 28.034,11.482 28.135,11.381 ; 28.034,11.482 28.034,10.663 ccw(c28.405,10.663) P3.18@28.405,10.292 ; 28.135,11.381 28.216,11.3 ; 28.135,11.381 28.135,10.772 ccw(c28.216,10.772) P3.18@28.216,10.691 ; P3.18@28.216,10.691 28.216,11.3 ; P3.18@28.216,10.691 28.216,10.482 ccw(c28.405,10.482) P3.18@28.405,10.292 ; 28.216,11.3 28.405,11.111 ; P3.18@28.405,10.292 28.405,11.111
  other v1: 26.895,14.943
SRB2_HD: R5.1 SV1.4 U9.4 | length 37.5
  Top Layer w0.19: R5.1@22.575,21.127 ccw(c21.91,21.792) 22.85,21.792 ; R5.1@22.709,20.993 ccw(c22.369,21.333) 22.85,21.333 ; R5.1@23.068,21.015 22.85,21.233 22.85,23.656 23.209,24.015 25.427,24.015 26.239,23.203 U9.4@26.239,20.7 ; 24.133,24.015 cw(c24.133,23.351) v1@24.603,23.82 ; 24.27,24.015 ccw(c24.27,24.485) v1@24.603,24.153 ; v1@24.935,23.82 cw(c25.405,23.351) 25.405,24.015 ; v1@24.935,24.153 ccw(c25.268,24.485) 25.268,24.015
  Bottom Layer w0.19: SV1.4@7.903,26.098 9.163,27.358 11.899,27.358 12.638,26.618 12.638,26.242 15.386,23.494 22.474,23.494 23.007,24.026 v1@24.776,24.026 ; SV1.4@7.984,26.604 ccw(c7.984,27.63) 8.71,26.904 ; SV1.4@7.984,26.794 ccw(c7.984,28.279) 9.034,27.229 ; SV1.4@8.271,26.127 cw(c9.089,26.127) 8.511,26.705 ; SV1.4@8.461,26.127 cw(c9.738,26.127) 8.835,27.029 ; SV1.4@8.651,26.127 cw(c10.387,26.127) 9.16,27.354 ; 24.105,24.026 cw(c24.105,23.323) v1@24.603,23.82 ; 24.298,24.026 ccw(c24.298,24.458) v1@24.603,24.153 ; v1@24.623,24.013 v1@24.724,23.912
  other v1: 24.769,23.987
START: P3.38 RPi4.11 US1.38 | length 90.2
  Top Layer w0.19: v1(53.325,31.406) 54.631,31.406 55.59,30.446 US1.38@58.643,30.446 ; v1@53.491,31.24 cw(c53.892,30.838) 53.892,31.406 cw(c53.892,31.973) v1@53.491,31.572
  Bottom Layer w0.19: RPi4.11@38.086,53.876 39.365,55.155 43.767,55.155 44.372,54.55 44.372,52.176 45.027,51.521 47.281,51.521 48.263,50.539 48.263,36.867 53.325,31.805 ; RPi4.11@38.086,54.378 ccw(c38.086,55.591) 38.943,54.733 ccw(c39.801,53.876) RPi4.11@38.588,53.876 ; RPi4.11@38.086,54.568 ccw(c38.086,56.24) 39.268,55.058 ccw(c40.45,53.876) RPi4.11@38.778,53.876 ; 52.641,32.488 cw(c51.559,31.406) v1@53.09,31.406 ; 52.966,32.164 cw(c52.208,31.406) v1@53.28,31.406 ; v1@53.211,31.611 ccw(c53.103,31.805) 53.325,31.805 ; 53.29,31.839 cw(c52.856,31.406) v1@53.47,31.406 ; P3.38@53.315,10.782 ccw(c52.133,11.964) 53.805,11.964 ccw(c55.476,11.964) P3.38@54.294,10.782 ; v1@53.439,31.611 cw(c53.546,31.805) 53.325,31.805 ; P3.38@53.45,10.648 ccw(c52.592,11.505) 53.805,11.505 ccw(c55.018,11.505) P3.38@54.16,10.648 ; v1@53.491,31.24 cw(c53.892,30.838) 53.892,31.406 cw(c53.892,31.973) v1@53.491,31.572 ; P3.38@53.805,10.292 53.805,12.306 54.162,12.663 55.666,12.663 65.674,22.671 65.674,24.812 62.95,27.536 58.656,27.536 55.035,31.157 54.485,31.157 54.236,31.406 v1(53.325,31.406) 53.325,31.805
pads on no net: C6.2 C6.3 C6.4 C6.5 C6.6 C6.7 C47.3 C47.4 C47.5 C47.6 R5.3 R5.4 R5.5 R5.6 R6.2 R6.3 R6.4 R6.5 R6.6 R6.7 RPi4.1 RPi4.3 RPi4.5 RPi4.6 RPi4.7 RPi4.8 RPi4.9 RPi4.10 RPi4.12 RPi4.14 RPi4.16 RPi4.17 RPi4.18 RPi4.20 RPi4.22 RPi4.25 RPi4.26 RPi4.27 RPi4.28 RPi4.30 RPi4.31 RPi4.32 RPi4.33 RPi4.34 RPi4.35 RPi4.36 RPi4.37 RPi4.38 RPi4.40 U5.5 U6.5 U7.5 U8.5 U9.3 U9.5 U10.3 U10.5

## Polygon pours and split planes (outlines as drawn)
GND on Top Layer "Top-No Net" (solid, remove dead copper, pour order 2): 0,60 0.013,59.987 0.013,-0.035 92.912,-0.035 92.944,-0.003 93,0.053 93,60
GND on Bottom Layer "Top-No Net" (solid, remove dead copper, pour order 4): 0,60 0,0 93,0 93,60

## Keep-outs
Keep-Out Layer:
  the board outline again, w0.203

## Other copper
Top Layer:
  pour cut-out: 11.786,50.079 11.786,25.578 11.661,25.453 11.31,25.803 10.759,25.803 10.759,49.954 9.757,50.956
  pour cut-out: 6.64,54.118 6.64,25.046 6.724,25.13 7.717,25.13 7.717,53.759 7.295,54.181
  pour cut-out: 25.359,57.724 74.397,57.724 74.799,57.322 74.799,54.343 26.796,54.343 26.141,54.998
  pour cut-out: 25.444,52.526 72.707,52.526 73.088,52.906 71.947,54.047 71.947,54.238 25.803,54.238 25.718,54.153
  pour cut-out: 72.628,52.526 73.257,52.526 73.362,52.632 73.14,52.854 72.85,52.854
  pour cut-out: 7.971,11.622 87.264,11.622 88.173,10.714 88.173,7.587 87.095,6.509 72.94,6.509 71.947,7.502 71.144,7.502 71.144,6.572 71.08,6.509 69.496,6.509 69.496,7.861 69.369,7.988 68.397,7.988 68.397,6.509 68.334,6.446 7.295,6.446 6.724,7.016 6.724,10.862 7.104,11.242
  pour cut-out: 68.344,8.368 68.017,8.041 68.017,5.738 73.151,5.738 73.563,6.15 73.119,6.593 73.119,7.861
  pour cut-out: 52.846,18.566 51.914,18.566 51.891,18.589 52.156,18.853 52.156,18.929 52.869,18.929 52.931,18.992
  region net 62: 48.985,39.877 49.263,39.598 49.263,39.188 49.381,39.306 49.793,39.306 49.793,39.518 50.091,39.816
  pour cut-out: 7.903,55.311 10.236,55.311 cw(c10.236,53.9) 11.233,54.897 ccw(c12.42,53.711) 10.741,53.711 10.741,53.3 8.583,53.3 cw(c8.583,55.771) 6.836,54.023
  pour cut-out: 6.645,25.468 6.645,23.817 ccw(c6.825,23.817) 6.698,23.69 cw(c7.078,23.309) 7.078,23.847 7.644,23.847 7.644,25.193 cw(c8.032,25.193) 7.757,25.468
  pour cut-out: 11.9,28.095 11.9,24.098 cw(c11.78,24.098) 11.865,24.014 ccw(c11.759,23.909) 11.759,24.057 11.085,24.057 11.085,28.111 ccw(c9.92,28.111) 10.744,28.935
  pour cut-out: 11.716,53.885 11.716,49.957 cw(c11.178,49.957) 11.558,49.576 ccw(c11.051,49.069) 11.051,49.786 10.174,49.786 10.174,52.898 cw(c11.669,52.898) 10.612,53.955
  pour cut-out: 24.064,56.428 24.064,54.134 ccw(c25.08,54.134) 24.361,53.415 ccw(c24.404,53.458) 24.404,53.398 25.605,53.398 25.605,55.8 cw(c25.725,55.8) 25.64,55.885
Bottom Layer:
  pour cut-out: 6.618,54.096 6.618,23.186 7.421,22.383 10.189,22.383 10.189,28.468 9.407,29.25 9.407,53.822
  pour cut-out: 25.296,57.703 74.186,57.703 74.905,56.984 74.905,54.322 71.228,54.322 70.341,55.209 24.916,55.209
  pour cut-out: 24.028,52.547 41.628,52.547 40.677,53.498 40.677,53.646 24.028,53.646 23.627,53.244
  pour cut-out: 73.352,52.621 53.174,52.621 53.206,52.653 53.206,53.899 69.263,53.899 70.996,55.632
  pour cut-out: 74.862,6.446 43.086,6.446 43.931,7.291 43.931,8.559 76.553,8.559 77.229,9.235
  pour cut-out: 88.131,10.207 88.131,7.27 87.412,6.551 82.236,6.551 82.236,8.685 82.194,8.728
  pour cut-out: 7.723,55.28 10.47,55.28 cw(c10.47,53.998) 11.377,54.904 cw(c10.569,54.097) 11.711,54.097 11.711,49.329 cw(c11.571,49.329) 11.67,49.23 cw(c11.439,49.461) 11.439,49.134 10.4,49.134
  pour cut-out: 32.697,12.251 32.697,12.008 cw(c32.366,12.008) 32.366,11.677 28.302,11.677 ccw(c28.302,11.507) 28.132,11.507 28.132,10.885 ccw(c28.165,10.885) 28.165,10.853 33.239,10.853 ccw(c33.239,11.014) 33.4,11.014 33.4,12.178 ccw(c33.11,12.178) 33.11,12.469

## Silkscreen, mask and mechanical layers (free items; w line width, h text height)
Top Overlay:
  text "AVDD" at 13.54,53.711 h0.8
  text "GND" at 13.577,51.72 h0.8
  text "BIAS" at 13.602,49.966 h0.8
  text "N8P" at 13.627,45.858 h0.8
  text "Group 8" at 75.893,45.33 h1.5
  text "N7P" at 13.54,44.229 h0.8
  text "N6P" at 13.552,40.634 h0.8
  text "+" at 83.726,38.922 h1
  text "N5P" at 13.364,38.279 h0.8
  text "N4P" at 13.703,35.38 h0.8
  text "N3P" at 13.552,33.507 h0.8
  text "N2P" at 13.477,31.453 h0.8
  text "+" at 83.839,31.387 h1
  text "N1P" at 13.652,28.296 h0.8
  text "+" at 83.87,25.512 h1
  text "SRB" at 13.652,24.764 h0.9
  text "AVSS" at 13.665,23.128 h0.9
  text "5V" at 13.788,20.745 h0.9

## Text inside footprints (layer, text, board x,y; h text height)
P3: Top Overlay "1" at 4.834,7.117 h1.52; Top Overlay "2" at 4.605,9.759 h1.52; Top Overlay "63" at 88.177,6.735 h1.52
RPi4: Top Overlay "1" at 22.135,53.241 h0.9; Top Overlay "2" at 21.906,55.882 h0.9; Top Overlay "39" at 74.992,53.165 h0.9; Top Overlay "40" at 74.992,55.781 h0.9
SV1: Top Overlay "27" at 10.981,55.565 h0.8 r90; Top Overlay "28" at 8.467,55.565 h0.8 r90; Top Overlay "2" at 8.552,17.846 h0.8 r90; Top Overlay "1" at 11.043,18.129 h0.8 r90